# Altium PCB ACFB_PCB.PcbDoc
Units mil, origin at the board's own origin, x right, y up, seen from the top; angles counter-clockwise.
Board outline 3681.1 x 2362.2 mil, 4 copper layers (Top Layer, Layer 2, Layer 3, Bottom Layer), stack 23.756 mil thick; 102 components, 44 nets, 278 pads, 289 vias.
Unrouted connection lines stored in the file: 1.
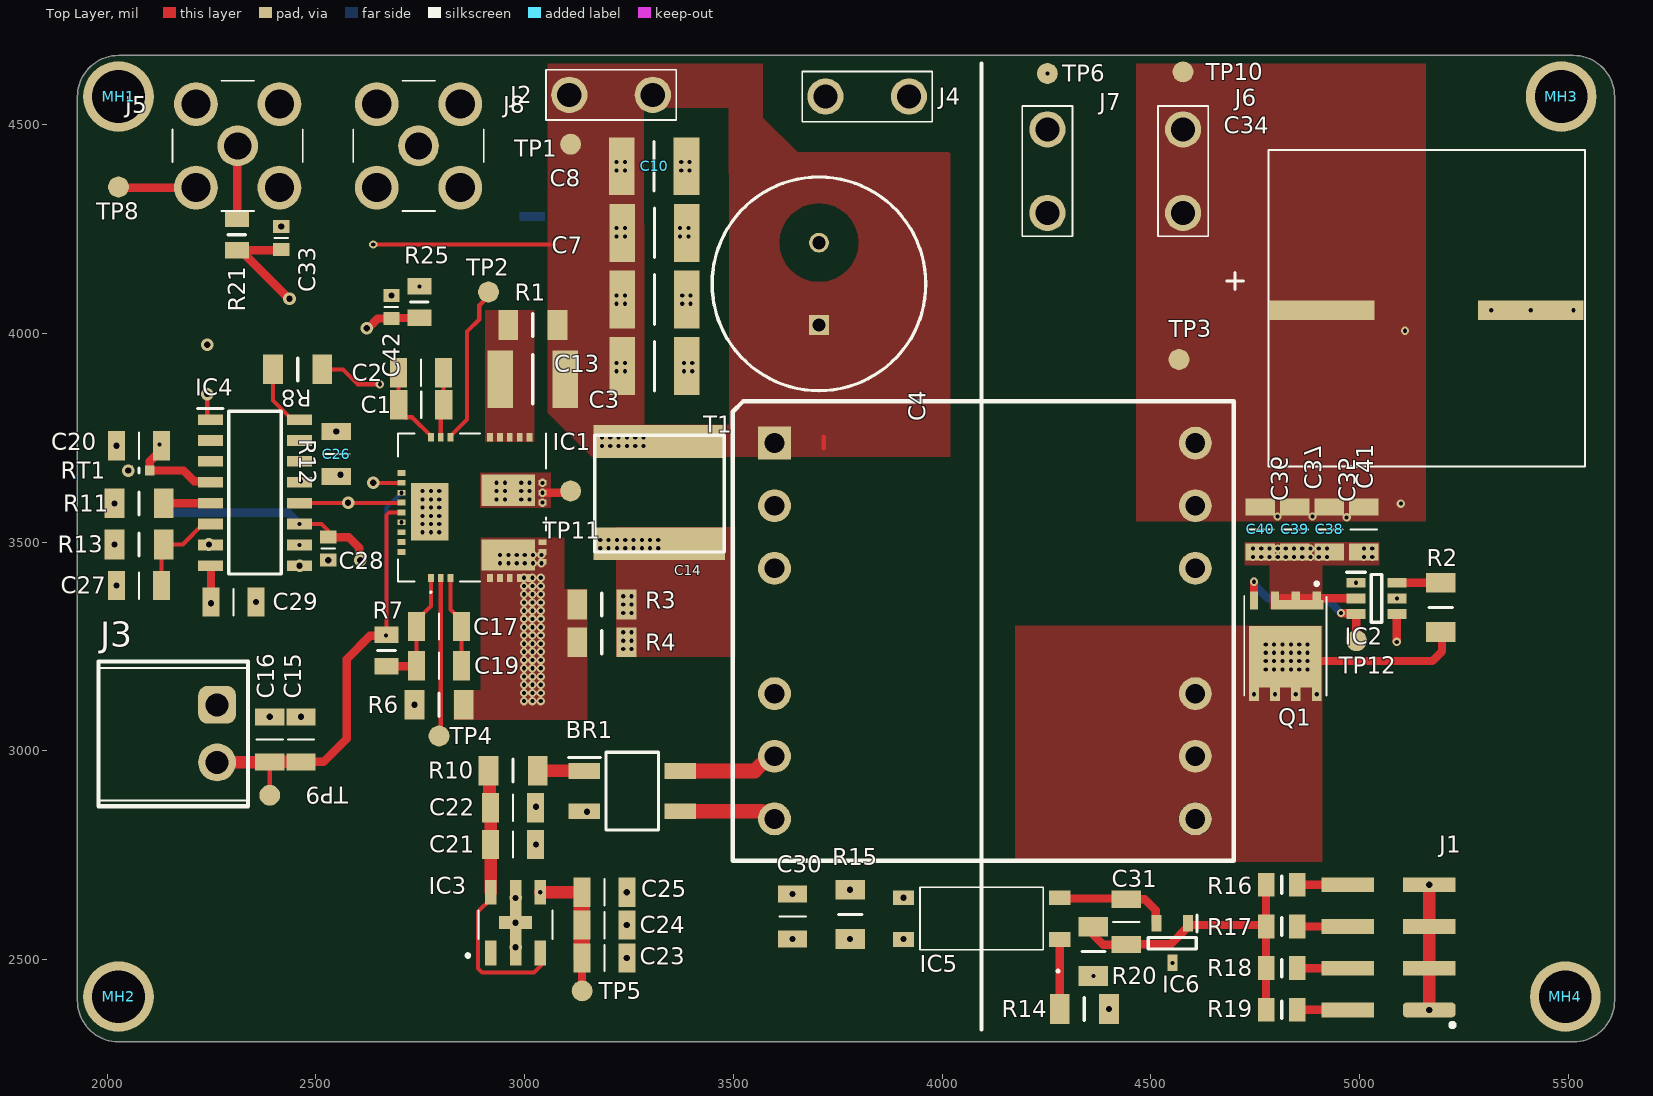
[diagram p0: Top Layer view]
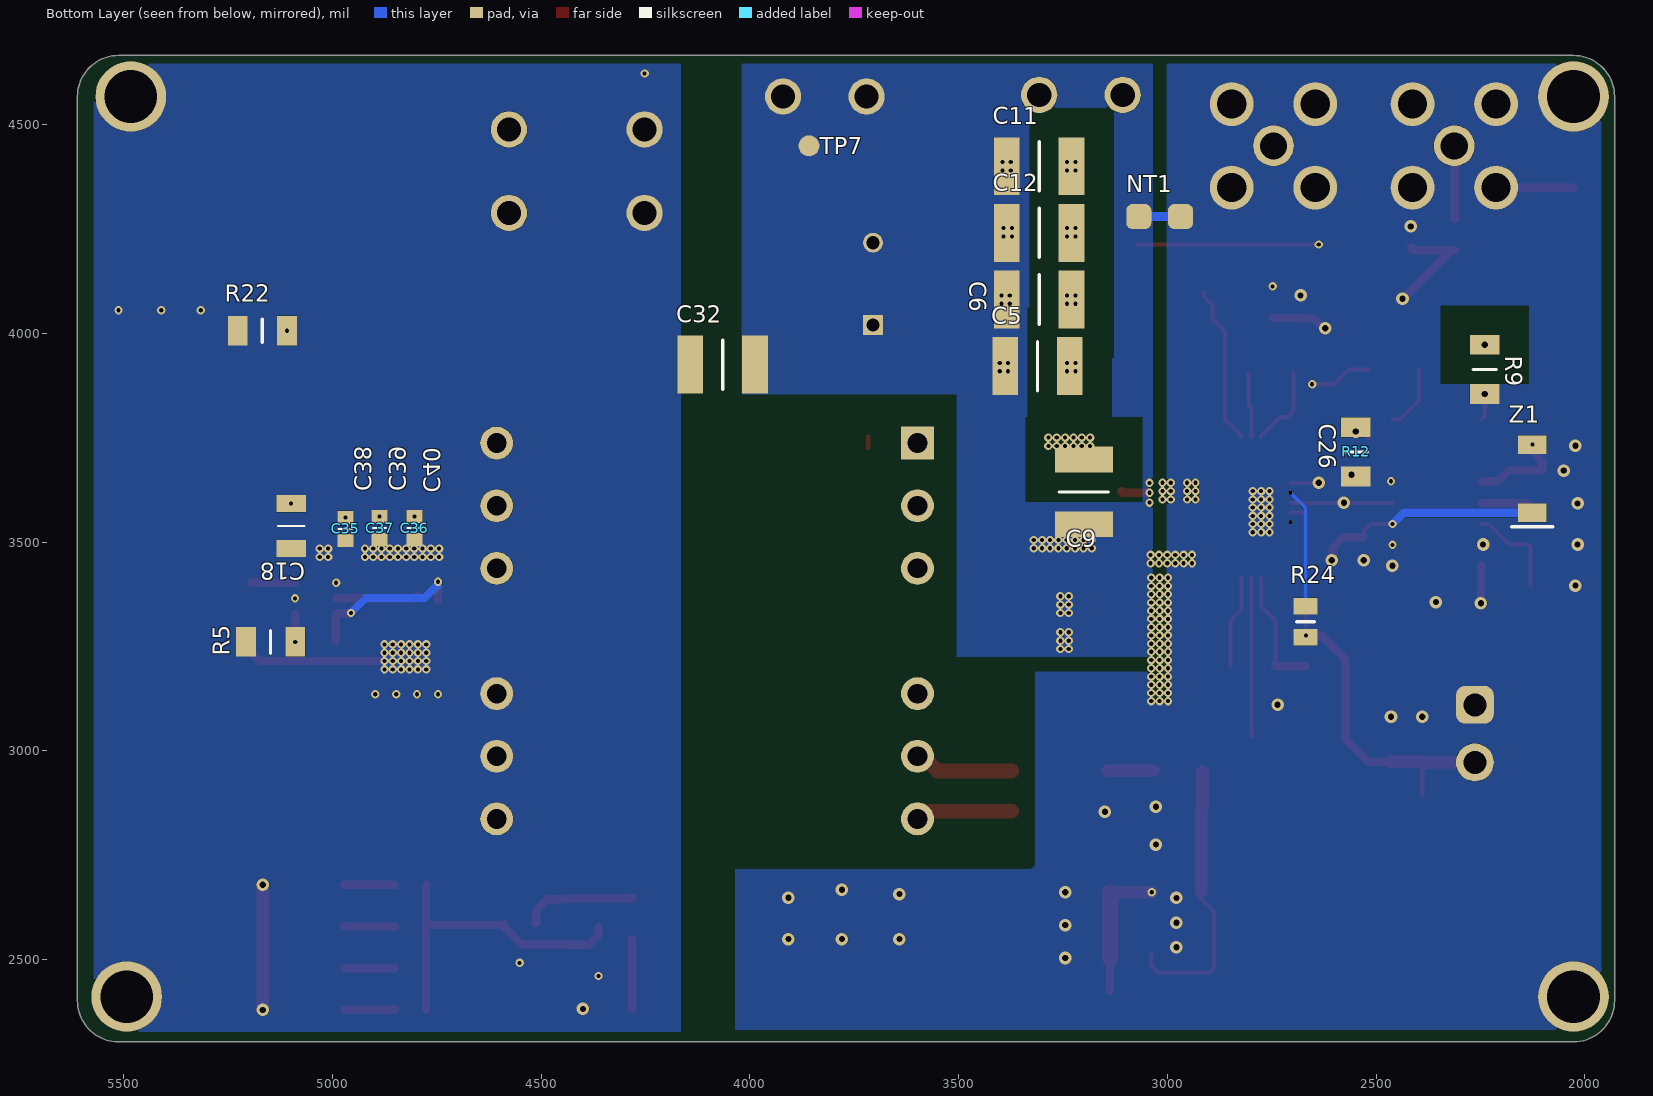
[diagram p1: Bottom Layer view, seen from below]
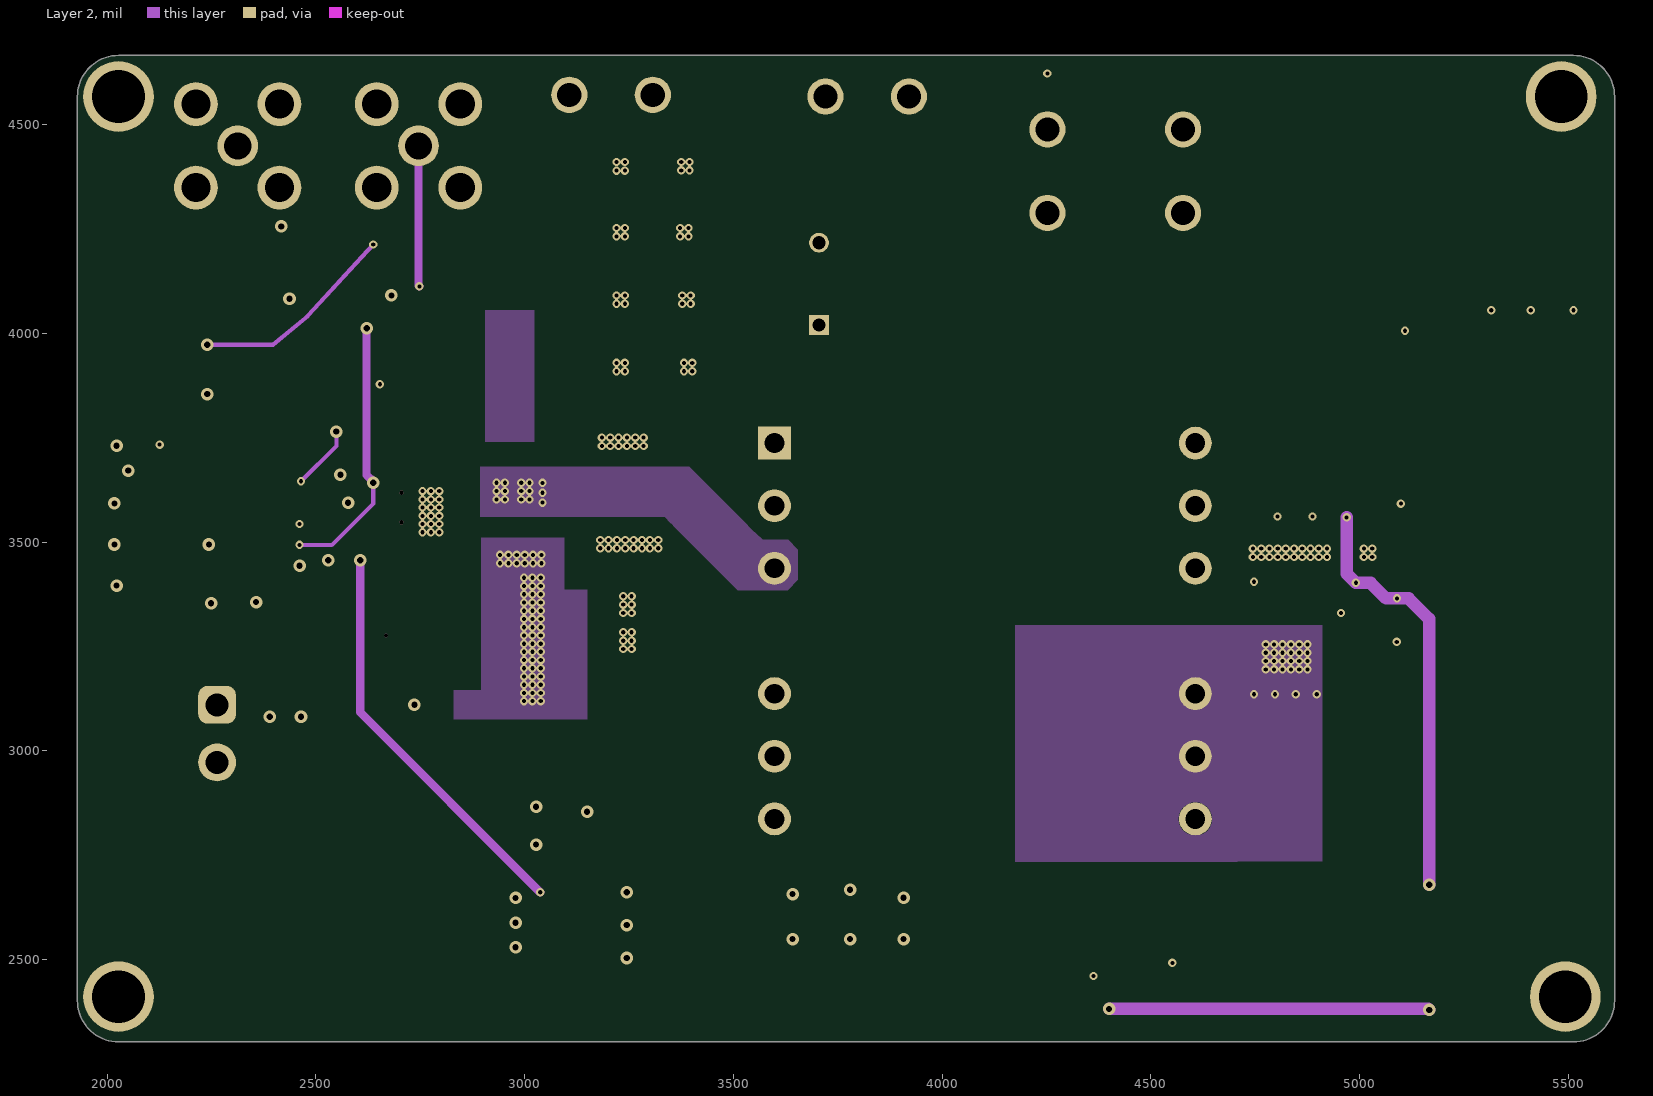
[diagram p2: Layer 2]
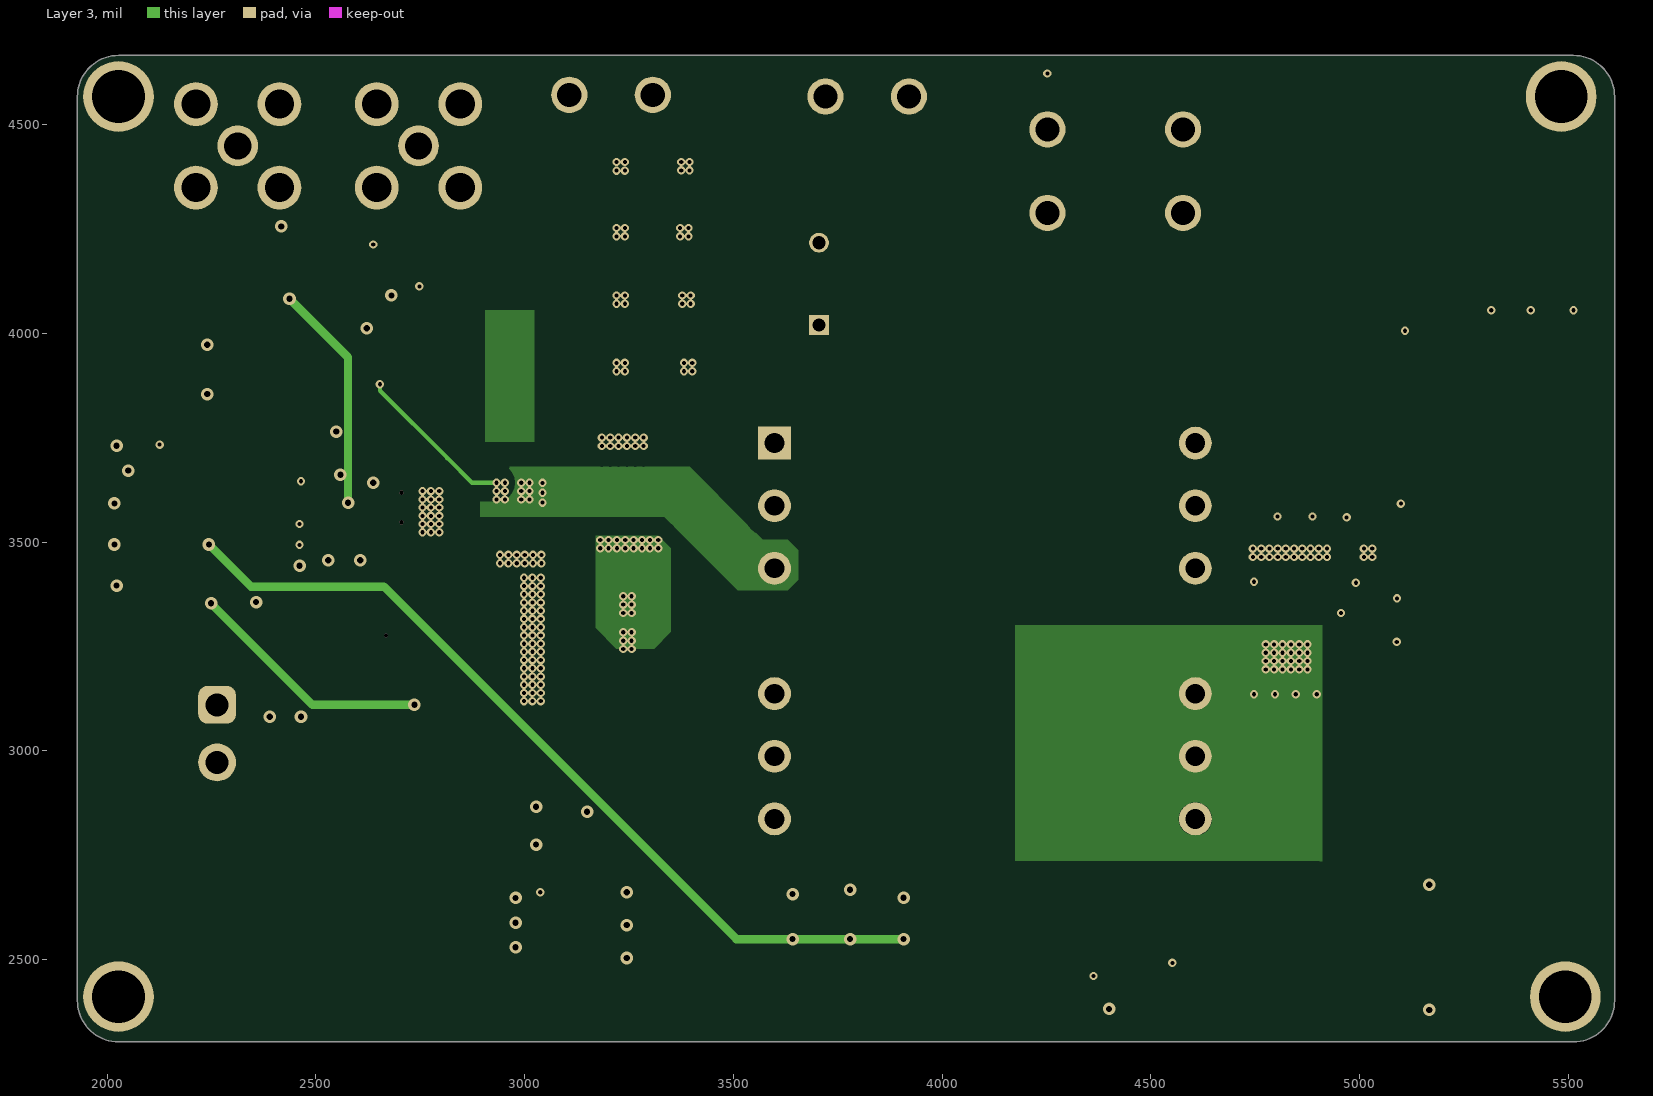
[diagram p3: Layer 3]

## Layer stack, top to bottom
Top Solder: solder mask 0.4, Solder Resist, Dk 3.5
Top Layer: signal copper 1.378
Dielectric 2: prepreg 2.8, PP-006, Dk 4.1
Layer 2: signal copper 1.4
Dielectric 1: dielectric 12.6, FR-4, Dk 4.8
Layer 3: signal copper 1.4
Dielectric 3: prepreg 2.8, PP-006, Dk 4.1
Bottom Layer: signal copper 1.378
Bottom Solder: solder mask 0.4, Solder Resist, Dk 3.5

## Board outline
1929.13,2401.97 1929.13,4566.54 cw(c2027.95,4566.54) 2027.95,4665.35 5511.42,4665.35 cw(c5511.42,4566.54) 5610.24,4566.54 5610.24,2401.97 cw(c5511.42,2401.97) 5511.42,2303.15 2027.95,2303.15 cw(c2027.95,2401.97)

## Design rules (kind name [scope] priority, off if disabled: settings)
Clearance Clearance_1 [All] p1 off: gap=12 ignorepadtopadclearanceinfootprint=TRUE
Clearance 192122 [InNet('NetC1_1') OR InNet('NetC1_2') OR InNet('NetC3_1')] p2: gap=1 ignorepadtopadclearanceinfootprint=TRUE
Clearance HighVoltageTopBottom [(InNetClass('HighVoltage') AND OnLayer('Bottom Layer'))  Or (InNetClass('HighVoltage') AND OnLayer('Top Layer'))] p3: gap=70 ignorepadtopadclearanceinfootprint=TRUE
Clearance HighVoltageMiddle [(InNetClass('HighVoltage') AND OnLayer('Layer 2'))  Or (InNetClass('HighVoltage') AND OnLayer('Layer 3'))] p4: gap=40 ignorepadtopadclearanceinfootprint=TRUE
Clearance HINLIN5 [InComponent('ic1')] p5: gap=1 ignorepadtopadclearanceinfootprint=TRUE
Height [All] p1: minheight=0 maxheight=1500 prefheight=500
PlaneConnect [All] p1: planeconnectstyle=Direct reliefexpansion=20 reliefentries=4 reliefconductorwidth=10 reliefairgap=10
PolygonConnect [All] p1: connectstyle=Direct reliefconductorwidth=10 reliefentries=4 polygonreliefangle="90 Angle" airgapwidth=10
RoutingVias [All] p1: holewidth=15 width=30 viastyle="Through Hole" minholewidth=10 minwidth=20 maxholewidth=30 maxwidth=60
SolderMaskExpansion [All] p1: expansion=4 istentingtop=FALSE
UnRoutedNet [All] p1: checkbadconnections=TRUE
Width [All] p1: maxlimit=200 minlimit=10 preferedwidth=20
27 further rules are at their usual default settings.

## Classes and differential pairs
net class HighVoltage: NetC1_2 NetIC1_12 NetIC1_20 VIN
component class main: BR1 C1 C2 C3 C4 C5 C6 C7 C8 C9 C10 C11 C12 C13 C14 C15 C16 C17 C18 C19 C20 C21 C22 C23 C24 C25 C26 C27 C28 C29 C30 C31 C37 IC1 IC2 IC3 IC4 IC5 IC6 J1 Q1 R1 R2 R3 R4 R5 R6 R7 R8 R9 R10 R11 R12 R13 R14 R15 R16 R17 R18 R19 R20 R24 RT1 T1 TP1 TP2 TP3 TP4 TP5 TP11 TP12 Z1
component class in_out: C11 C12 C13 C29 C30 C31 C32 C33 C34 C35 C36 C37 C38 C39 C40 C41 C42 J2 J3 J4 J5 J6 J7 J8 MH1 MH2 MH3 MH4 NT1 R1 R21 R22 R25 TP6 TP7 TP8 TP9 TP10

## Components (designator, comment, footprint, x,y, rotation, side; value= is the part's Value field where it differs from the comment)
BR1 "MB4S" SOP245P670X290-4N 3257.87,2903.54 r0 top
C1 "0.1uF" Capcitor_1206 2752.54,3828.74 r0 top
C2 "0.1uF" Capcitor_1206 2751.97,3905.51 r0 top
C3 "470nF" Capacitor_1812 3019.68,3889.76 r0 top
C4 "22uF" CAPPRD500W60D1300H2700 3705,4020 r90 top
C5 "220nF" Capacitor_1812 3311.02,3921.26 r180 bottom
C6 "220nF" Capacitor_1812 3307.09,4080.84 r0 bottom
C7 "220nF" Capacitor_1812 3311.02,4080.84 r180 top
C8 "220nF" Capacitor_1812 3311.02,4240.42 r0 top
C9 "220nF" Capacitor_1812 3200,3620 r90 bottom
C10 "220nF" Capacitor_1812 3310,4400 r0 top
C11 "220nF" Capacitor_1812 3307.09,4400 r0 bottom
C12 "220nF" Capacitor_1812 3307.09,4240.42 r180 bottom
C13 "220nF" Capacitor_1812 3311.02,3921.26 r0 top
C14 "1u" TDKB58031 3167.83,3756.06 r270 top
C15 "10uF" Capcitor_1206 2464.57,3027.56 r270 top
C16 "0.1uF" Capcitor_1206 2389.76,3027.56 r90 top
C17 "0.1uF" Capcitor_1206 2795.28,3297.64 r0 top
C18 "1uF" Capcitor_1206 5098.42,3538.19 r90 bottom
C19 "10uF" Capcitor_1206 2795.28,3203.74 r0 top
C20 "100nF" Capcitor_1206 2076.77,3730.32 r0 top
C21 "2.2uF" Capcitor_1206 2972.44,2775.59 r180 top
C22 "2.2uF" Capcitor_1206 2972.44,2863.97 r180 top
C23 "2.2uF" Capcitor_1206 3190.94,2503.94 r180 top
C24 "2.2uF" Capcitor_1206 3190.94,2582.68 r180 top
C25 "2.2uF" Capcitor_1206 3190.94,2661.42 r180 top
C26 "100nF" Capcitor_1206 2549.21,3710.63 r90 top
C27 "100nF" Capcitor_1206 2076.77,3395.67 r180 top
C28 "1uF" Capacitor_0805 2529.53,3484.25 r90 top
C29 "10nF" Capcitor_1206 2303.15,3356.3 r0 top
C30 "100nF" Capcitor_1206 3641.73,2603.15 r270 top
C31 "100nF" Capcitor_1206 4440.94,2590.55 r270 top
C32 "390pF" Capacitor_1812 4065,3925 r180 bottom
C33 "100pF" Capacitor_0805 2417.32,4228.35 r270 top
C34 "2700uF" Capacitor_Electrolytic_Vib_Res 5161.42,4055.12 r0 top
C35 "100nF" Capacitor_0805 4968.5,3531.5 r90 bottom
C36 "100nF" Capacitor_0805 4803.15,3533.46 r90 bottom
C37 "100nF" Capacitor_0805 4886.81,3533.46 r90 bottom
C38 "2.2uF" Capcitor_1206 4927.22,3530.12 r90 top
C39 "2.2uF" Capcitor_1206 4844.6,3530.12 r90 top
C40 "2.2uF" Capcitor_1206 4761.98,3530.12 r90 top
C41 "2.2uF" Capcitor_1206 5009.84,3530.12 r90 top
C42 "100pF" Capacitor_0805 2681.1,4062.99 r270 top
IC1 "MASTERGAN1" MASTERGAN1 2874.02,3582.68 r90 top
IC2 "SRK1000" SOT95P280X145-6N 5040,3365 r0 top
IC3 "S-1212BG0-U5T1U" S1212BG0U5T1U 2978.35,2588.58 r0 top
IC4 "NCP1568S02DBR2G" SOIC127P600X175-16N 2354.33,3618.11 r0 top
IC5 "FODM1009R2V" FODM1009R2V 4094.49,2598.43 r90 top
IC6 "NCP431AVSNT1G" SOT96P237X111-3N 4551.18,2539.37 r270 top
J1 "Header_2x4" Header_2x4 5068.9,2529.53 r90 top
J2 "1289-STR" 1289STR 3107.09,4570.87 r0 top
J3 "Connector_3.5mm" Connector_3.5 2263.78,3041.34 r270 top
J4 "1289-STR" 1289STR 3720.47,4566.93 r0 top
J5 "142-0701-301" 1420701301 2312.99,4448.82 r90 top
J6 "1289-STR" 1289STR 4576.77,4488.19 r270 top
J7 "1289-STR" 1289STR 4251.97,4488.19 r270 top
J8 "142-0701-301" 1420701301 2746.06,4448.82 r90 top
MH1 "Mounting_Hole_M3" Mounting_Hole_M3#1 1948.82,4586.61 r0 top
MH2 "Mounting_Hole_M3" Mounting_Hole_M3#2 1958.66,2411.42 r0 top
MH3 "Mounting_Hole_M3" Mounting_Hole_M3#3 5521.65,4576.77 r0 top
MH4 "Mounting_Hole_M3" Mounting_Hole_M3#4 5531.5,2411.42 r0 top
NT1 "Net tie" "Net tie" 3068.5,4279.53 r180 bottom net-tie
Q1 "BSC014N06NSATMA1" BSC010N04LS6ATMA1 4821.85,3250.59 r180 top
R1 "300k" Resistor_1206 3019.68,4019.68 r0 top
R2 "330" Resistor_1206 5193.9,3343.5 r270 top
R3 "R680" Resistor_1206 3185.04,3350.39 r0 top
R4 "R680" Resistor_1206 3185.04,3259.84 r0 top
R5 "82k" Resistor_1206 5147.64,3260.83 r180 bottom
R6 "510" Resistor_1206 2795.28,3110.24 r0 top
R7 "0" Resistor_0805 2669.29,3240.16 r270 top
R8 "1k" Resistor_1206 2456.69,3913.39 r0 top
R9 "1k" Resistor_1206 2240.16,3913.39 r90 bottom
R10 "1" Resistor_1206 2972.44,2952.76 r180 top
R11 "82k" Resistor_1206 2076.77,3592.52 r180 top
R12 "8k" Resistor_1206 2549.21,3715.75 r90 bottom
R13 "82k" Resistor_1206 2076.77,3494.09 r180 top
R14 "1k" Resistor_1206 4340.55,2381.89 r0 top
R15 "47k" Resistor_1206 3779.53,2608.27 r270 top
R16 "154k" Resistor_0805 4812.99,2679.13 r0 top
R17 "91k" Resistor_0805 4812.99,2579.4 r0 top
R18 "62k" Resistor_0805 4812.99,2479.66 r0 top
R19 "24k" Resistor_0805 4812.99,2379.92 r0 top
R20 "24k" Resistor_1206 4362.2,2519.68 r90 top
R21 "51" Resistor_0805 2311.02,4236.22 r90 top
R22 "10k" Resistor_1206 5167.32,4005.91 r180 bottom
R24 "4.7k" Resistor_0805 2669.29,3309.06 r90 bottom
R25 "51" Resistor_0805 2748.03,4074.8 r90 top
RT1 "NTCG104EF104FT1SX" THRMC1005X55N 2076.77,3671.26 r0 top
T1 "TI-PQ26" PQ26-20-K 3598.42,3737.01 r0 top
TP1 "Test point" "Test point" 3110.24,4452.76 r0 top
TP2 "Test point" "Test point" 2913.39,4098.82 r90 top
TP3 "Test point" "Test point" 4566.93,3937.01 r90 top
TP4 "Test point" "Test point" 2795.28,3035.43 r90 top
TP5 "Test point" "Test point" 3137.79,2425.2 r0 top
TP6 "Test point" "Test point" 4251.97,4622.05 r180 top
TP7 "Test point" "Test point" 3858.27,4448.82 r180 bottom
TP8 "Test point" "Test point" 2027.56,4350.39 r90 top
TP9 "Test point" "Test point" 2389.76,2893.7 r180 top
TP10 "Test point" "Test point" 4576.77,4625.98 r180 top
TP11 "Test point" "Test point" 3110.24,3622.05 r90 top
TP12 "Test point" "Test point" 4992.13,3263.78 r90 top
Z1 "TDZ15J" SODFL4725X105N 2125.98,3651.57 r90 bottom

## Footprints (in the part's own frame and the unit in brackets; to place one, negate y for a bottom-side part, rotate by r counter-clockwise, add the part's x,y. Pads: shape width x height; smd on the part's side, far side on the other; paste and mask are expansions set on the pad)
1289STR [mm]
  round 2.205 hole 1.47: 1(0,0) 2(5.08,0)
  silkscreen extent -1.42,-1.53 6.5,1.53, body extent -1.42,-1.53 6.5,1.53, height 14.47
1420701301 [mil]
  round 97.52 hole 65: 1(0,0)
  round 105 hole 70: 2(-100,100) 3(-100,-100) 4(100,-100) 5(100,100)
  silkscreen extent -156,-156 156,156, body extent -150,-156 466,156, height 378
BSC010N04LS6ATMA1 [mm]
  rect 0.5x0.5 smd: 1(-1.905,-3.075) 2(-0.635,-3.075) 3(0.635,-3.075)
  rect 0.5x1.1 smd: 4(1.905,-2.775)
  rect 0.6x0.8 smd: 5(1.905,2.925) 6(0.635,2.925) 7(-0.635,2.925) 8(-1.905,2.925)
  rect 4.41x3.75 smd: 9(0,0.65)
  rect 3.2x0.6 smd: 10(-0.715,-2.525)
  silkscreen extent -2.5,-3.9 2.5,3, body extent -2.5,-3.27 2.5,3.26, height 1.2
Capacitor_0805 [mm] "Capacitor - standard SMD"
  rect 0.78x0.99 smd: 1(-0.7,0) 2(0.7,0)
  silkscreen extent 0,-0.4 0,0.41, body extent -0.8,-0.41 0.8,0.41, height 0.9
Capacitor_1812 [mm] "Capacitor - Stnadard SMD"
  rect 1.56x3.52 smd: 1(-1.97,0) 2(1.97,0)
  silkscreen extent 0,-1.5 0,1.5, body extent -2.3,-1.6 2.3,1.6, height 2.8
Capacitor_Electrolytic_Vib_Res [mm] "Capacitor _ Electrolytic SMD"
  rect 6.4x1.2 smd: 1(-6.4,0) 2(6.3,0)
  silkscreen extent -12.19,-9.5 9.6,9.75, body extent -9,-8.75 9,9.25, height 21
Capcitor_1206 [mm] "Capacitor - Stnadard SMD"
  rect 1.04x1.78 smd: 1(-1.37,0) 2(1.37,0)
  silkscreen extent 0,-0.8 0,0.8, body extent -1.6,-0.8 1.6,0.8, height 0.95
CAPPRD500W60D1300H2700 [mm]
  rect 1.2x1.2 hole 0.8: 1(0,0)
  round 1.2 hole 0.8: 2(5,0)
  silkscreen extent -4,-6.5 9,6.5, body extent -4.23,-6.75 9.23,6.75, height 27
Connector_3.5 [mm] "Connector"
  rrect50% 2.3x2.3 hole 1.4: 1(-1.75,0)
  round 2.3 hole 1.4: 2(1.75,0)
  silkscreen extent -4.37,-7.22 4.43,1.9, body extent -4,-7.22 4.08,1.88, height 20
FODM1009R2V [mm]
  rect 0.9x1.3 smd: 1(-1.27,-4.75) 2(1.27,-4.75) 3(1.27,4.75) 4(-1.27,4.75)
  silkscreen extent -3.25,-4.7 1.9,3.75, body extent -1.91,-4.44 1.91,4.44, height 2.2
Header_2x4 [mm] "Goldpins Male"
  rrect50% 0.9x3.2 smd: 1(-3.81,-2.475)
  rect 0.9x3.2 smd: 2(-3.81,2.475) 3(-1.27,-2.475) 4(-1.27,2.475) 5(1.27,-2.475) 6(1.27,2.475) 7(3.81,-2.475) 8(3.81,2.475)
  silkscreen extent -4.85,-4.01 -4.6,-3.76, body extent -5.16,-3.75 5.16,3.75, height 10.05
MASTERGAN1 [mm]
  rect 0.5x0.35 smd: 1(-4.28,2.5) 2(-4.28,1.9) 3(-4.28,1.3) 4(-4.28,-1.1) 5(-4.28,-1.7) 6(-4.28,-2.3) 7(-4.28,-2.9) 8(-4.28,-3.5) 15(4.28,-3.5) 16(4.28,-2.9) 17(4.28,-2.3) 18(4.28,-1.7) 19(4.28,-1.1) 20(4.28,1.3) 21(4.28,1.9) 22(4.28,2.5)
  rect 0.35x0.5 smd: 9(-3.305,-4.29) 10(-2.705,-4.29) 11(-2.105,-4.29) 12(0.3,-4.29) 13(0.9,-4.29) 14(1.5,-4.29) 23(2.1,4.29) 24(1.5,4.29) 25(0.9,4.29) 26(0.3,4.29) 27(-0.3,4.29) 28(-0.9,4.29) 29(-1.5,4.29) 30(-2.1,4.29) 31(-2.7,4.29)
  rect 3.5x2.26 smd: MP1(-0.25,2.57)
  rect 1.9x3.25 smd: MP2(-2.88,-2.215) MP3(1.05,-2.215)
  silkscreen extent -5.2,-4.5 4.5,4.5, body extent -4.5,-4.5 4.5,4.5, height 1.1
Mounting_Hole_M3#1 [mil]
  round 169 hole 126: 1(78.74,-19.68)
Mounting_Hole_M3#2 [mil]
  round 169 hole 126: 1(68.9,0)
Mounting_Hole_M3#3 [mil]
  round 169 hole 126: 1(-39.37,-9.84)
Mounting_Hole_M3#4 [mil]
  round 169 hole 126: 1(-39.37,0)
"Net tie" [mil] "Net tie - SMD short"
  rrect50% 60x60 smd: 1(0,0) 2(100,0)
  Top Layer region: 20,10 80,10 80,-10 20,-10
PQ26-20-K [mm] "Transformer"
  rect 2x2 hole 1.2: 1(0,0)
  round 2 hole 1.2: 2(0,-3.81) 3(0,-7.62) 4(0,-15.24) 5(0,-19.05) 6(0,-22.86) 7(25.6,-22.86) 8(25.6,-19.05) 9(25.6,-15.24) 10(25.6,-7.62) 11(25.6,-3.81) 12(25.6,0)
  silkscreen extent -2.54,-25.4 27.94,2.54, body extent -1.95,-25.08 27.35,2.22, height 25.1
Resistor_0805 [mm] "Resistor - Standard SMD"
  rect 1x1.45 smd: 1(-0.95,0) 2(0.95,0)
  silkscreen extent 0,-0.52 0,0.52, body extent -1,-0.63 1,0.63, height 0.65
Resistor_1206 [mm] "Resistor - Stnadard SMD"
  rect 1.2x1.8 smd: 1(-1.5,0) 2(1.5,0)
  silkscreen extent 0,-0.7 0,0.7, body extent -1.6,-0.8 1.6,0.8, height 0.75
S1212BG0U5T1U [mm]
  rect 0.7x1.5 smd: 1(-1.5,-1.85) 3(1.5,-1.85) 4(1.5,1.85) 5(-1.5,1.85)
  rect 0.7x2.2 smd: 2(0,-1.5) A2(0,1.5)
  rect 2x0.8 smd: B2(0,0)
  silkscreen extent -3,-2.1 2.25,0.75, body extent -2.25,-1.25 2.25,1.25, height 1.7
SODFL4725X105N [mm]
  rect 1.12x1.72 smd: 1(-2.075,0) 2(2.075,0)
  silkscreen extent -2.92,-1.25 -2.92,1.25, body extent -2.35,-1.25 2.35,1.25, height 1.05
SOIC127P600X175-16N [mm]
  rect 1.525x0.65 smd: 1(-2.712,4.445) 2(-2.712,3.175) 3(-2.712,1.905) 4(-2.712,0.635) 5(-2.712,-0.635) 6(-2.712,-1.905) 7(-2.712,-3.175) 8(-2.712,-4.445) 9(2.712,-4.445) 10(2.712,-3.175) 11(2.712,-1.905) 12(2.712,-0.635) 13(2.712,0.635) 14(2.712,1.905) 15(2.712,3.175) 16(2.712,4.445)
  silkscreen extent -3.47,-4.95 1.6,5.12, body extent -3,-4.95 3,4.95, height 1.75
SOP245P670X290-4N [mm]
  rect 1.925x0.95 smd: 1(-2.912,1.225) 2(-2.912,-1.225) 3(2.912,-1.225) 4(2.912,1.225)
  silkscreen extent -3.88,-2.36 1.6,2.36, body extent -3.35,-2.36 3.35,2.36, height 2.9
SOT95P280X145-6N [mm]
  rect 1.15x0.6 smd: 1(-1.25,0.95) 2(-1.25,0) 3(-1.25,-0.95) 4(1.25,-0.95) 5(1.25,0) 6(1.25,0.95)
  silkscreen extent -1.83,-1.45 0.33,1.6, body extent -1.4,-1.45 1.4,1.45, height 1.45
SOT96P237X111-3N [mm]
  rect 1x0.6 smd: 1(-1.2,0.955) 2(-1.2,-0.955) 3(1.2,0)
  silkscreen extent -1.7,-1.46 0.35,1.5, body extent -1.18,-1.46 1.18,1.46, height 1.11
TDKB58031 [mil] "1uF 500volt Ceralink (LP) J-Style, Mouser: B58031U5105M062"
  rect 78.74x314.96 smd: 1(15,155) 2(260,155)
  silkscreen extent 0,0 280,310, body extent 5,0 280,310, height 197
"Test point" [mil] "Test point SMD, 50 mil"
  round 50 smd: 1(0,0)
THRMC1005X55N [mm]
  rect 0.55x0.6 smd: 1(-0.65,0) 2(0.65,0)
  silkscreen extent 0,-0.15 0,0.15, body extent -0.5,-0.25 0.5,0.25, height 0.55

## Part data
BR1: "Bridge Rectifier", Manufacturer_Name=onsemi, Mouser Part Number=512-MB4S, Arrow Part Number=MB4S, Arrow Price/Stock=https://www.arrow.com/en/products/mb4s/on-semiconductor?region=europe, Datasheet Link=http://www.onsemi.com/pub/Collateral/MB8S-D.PDF, Height=2.9mm, Manufacturer_Part_Number=MB4S, Mouser Price/Stock=https://www.mouser.co.uk/ProductDetail/onsemi-Fairchild/MB4S?qs=DPwKKv7J1fyzyqMN%2FwPoFQ%3D%3D
C1 C2: library part Capacitor_1206, "Capacitor - Standard SMD", Voltage=25V, Capacitance=0.1uF
C3: library part Capacitor_1812, "Capacitor - Standard SMD", MPN=CGA8N4X7T2W474K230KA, Voltage=450V, Capacitance=470nF
C4: library part Capacitor_Electrolytic_THT, "Capacitor - Electrolytic  THT", MPN=ESH226M500AL4AA, Voltage=500V, Capacitance=22uF
C5 C6 C7 C8 C9 C10 C11 C12 C13: library part Capacitor_1812, "Capacitor - Standard SMD", MPN=C1812C224MCRACTU, Voltage=500, Capacitance=220nF
C14: library part Capacitor_1206, "Capacitor - Standard SMD", Capacitance=100nF, MPN=1206B104K451CT, Voltage=450V
C15 C16 C17 C19: library part Capacitor_1206, "Capacitor - Standard SMD", Voltage=16V
  C15 C19: Capacitance=10uF
  C16 C17: Capacitance=0.1uF
C18: library part Capacitor_1206, "Capacitor - Standard SMD", MPN=CL31B105KBHNFNE, Voltage=50, Capacitance=1uF
C20 C26 C27 C29 C30 C31: library part Capacitor_1206, "Capacitor - Standard SMD", Voltage=50V
  C20 C26 C27 C30 C31: Capacitance=100nF
  C29: Capacitance=10nF
C21 C22 C23 C24 C25 C38 C39 C40 C41: library part Capacitor_1206, "Capacitor - Standard SMD", MPN=CL31B225KBHNFNE, Voltage=50V, Capacitance=2.2uF
C28: library part Capacitor_0805, "Capacitor - Standard SMD", Voltage=25V, Capacitance=1uF
C32: library part Capacitor_1812, "Capacitor - Standard SMD", MPN=1812B391K202CT, Voltage=2kV, Capacitance=390pF
C33 C42: library part Capacitor_0805, "Capacitor - Standard SMD", Voltage=12V, Capacitance=100pF
C34: library part Capacitor_Electrolytic_Vib_Res, "Capacitor - Electrolytic  SMD", Voltage=35V, Capacitance=2700uF
C35 C36 C37: library part Capacitor_0805, "Capacitor - Standard SMD", MPN=CL21B104KBCNNND, Voltage=50V, Capacitance=100nF
IC1: "Integrated Circuit", Manufacturer_Name=STMicroelectronics, Mouser Part Number=511-MASTERGAN1, Arrow Part Number=MASTERGAN1, Arrow Price/Stock=https://www.arrow.com/en/products/mastergan1/stmicroelectronics?region=nac, Datasheet Link=https://www.mouser.com/datasheet/2/389/mastergan1-1893186.pdf, Height=1mm, Manufacturer_Part_Number=MASTERGAN1, Mouser Price/Stock=https://www.mouser.co.uk/ProductDetail/STMicroelectronics/MASTERGAN1?qs=hWgE7mdIu5TUQlvSzk235A%3D%3D
IC2: "Integrated Circuit", Manufacturer_Name=STMicroelectronics, Mouser Part Number=511-SRK1000, Arrow Part Number=SRK1000, Arrow Price/Stock=https://www.arrow.com/en/products/srk1000/stmicroelectronics, Datasheet Link=https://www.st.com/resource/en/datasheet/srk1000.pdf, Height=1.45mm, Manufacturer_Part_Number=SRK1000, Mouser Price/Stock=https://www.mouser.co.uk/ProductDetail/STMicroelectronics/SRK1000?qs=byeeYqUIh0P1pUk%2FLXsjaA%3D%3D
IC3: "Integrated Circuit", Manufacturer_Name="ABLIC Inc.", Mouser Part Number=628-S-1212BG0-U5T1U, Datasheet Link=https://www.mouser.com/datasheet/2/360/S1212B_D_E-1480071.pdf, Height=1.6mm, Manufacturer_Part_Number=S-1212BG0-U5T1U, Mouser Price/Stock=https://www.mouser.co.uk/ProductDetail/ABLIC/S-1212BG0-U5T1U?qs=PqoDHHvF648vInS7ukjfAw%3D%3D
IC4: "Integrated Circuit", Manufacturer_Name=onsemi, Mouser Part Number=863-NCP1568S02DBR2G, Arrow Part Number=NCP1568S02DBR2G, Arrow Price/Stock=https://www.arrow.com/en/products/ncp1568s02dbr2g/on-semiconductor?region=nac, Datasheet Link=https://datasheet.datasheetarchive.com/originals/distributors/Datasheets_SAMA/e6c73cfd9b14743cc4dd16ca5df3e455.pdf, Height=1.35mm, Manufacturer_Part_Number=NCP1568S02DBR2G, Mouser Price/Stock=https://www.mouser.co.uk/ProductDetail/onsemi/NCP1568S02DBR2G?qs=BJlw7L4Cy7%252Bni9d8vX6s0A%3D%3D
IC5: "Integrated Circuit", Manufacturer_Name=onsemi, Mouser Part Number=863-FODM1009R2V, Arrow Part Number=FODM1009R2V, Arrow Price/Stock=https://www.arrow.com/en/products/fodm1009r2v/on-semiconductor?region=nac, Datasheet Link=https://componentsearchengine.com/Datasheets/1/FODM1009R2V.pdf, Height=2.4mm, Manufacturer_Part_Number=FODM1009R2V, Mouser Price/Stock=https://www.mouser.co.uk/ProductDetail/onsemi/FODM1009R2V?qs=d0WKAl%252BL4Kbb4VetG0t5Tw%3D%3D
IC6: "Programmable Precision / Reference", Manufacturer_Name=onsemi, Mouser Part Number=863-NCP431AVSNT1G, Arrow Part Number=NCP431AVSNT1G, Arrow Price/Stock=https://www.arrow.com/en/products/ncp431avsnt1g/on-semiconductor, Datasheet Link=http://www.onsemi.com/pub/Collateral/NCP431-D.PDF, Height=1.11mm, Manufacturer_Part_Number=NCP431AVSNT1G, Mouser Price/Stock=https://www.mouser.com/Search/Refine.aspx?Keyword=863-NCP431AVSNT1G
J2 J4 J6 J7: "Connector", Manufacturer_Name="Keystone Electronics", Mouser Part Number=534-1289-STR, Datasheet Link=https://www.mouser.com/datasheet/2/215/Keystone_Electronics_12182018_1289-ST-1510776.pdf, Height=14.37mm, Manufacturer_Part_Number=1289-STR, Mouser Price/Stock=https://www.mouser.co.uk/ProductDetail/Keystone-Electronics/1289-STR?qs=0lSvoLzn4L%252BMUIbPVNHg8g%3D%3D
J5 J8: "Connector", Manufacturer_Name="Cinch Connectivity Solutions", Mouser Part Number=530-142-0701-301, Arrow Part Number=142-0701-301, Arrow Price/Stock=https://www.arrow.com/en/products/142-0701-301/cinch-connectivity-solutions?region=nac, Datasheet Link=https://datasheet.datasheetarchive.com/originals/distributors/Datasheets_SAMA/2ec9b041f970d014d2778887508fd87c.pdf, Design Item ID=142-0701-301, Height=9.779mm, Manufacturer_Part_Number=142-0701-301, Mouser Price/Stock=https://www.mouser.co.uk/ProductDetail/Johnson-Cinch-Connectivity-Solutions/142-0701-301?qs=VqHsQWpF6un5h9kBF%252BTxDw%3D%3D, Source=KN_ECART.SchLib
Q1: "MOSFET (N-Channel)", Manufacturer_Name=Infineon, Mouser Part Number=726-BSC014N06NSATMA1, Arrow Part Number=BSC014N06NSATMA1, Arrow Price/Stock=https://www.arrow.com/en/products/bsc014n06nsatma1/infineon-technologies-ag, Datasheet Link=http://www.farnell.com/datasheets/1849651.html, Height=1.1mm, Manufacturer_Part_Number=BSC014N06NSATMA1, Mouser Price/Stock=https://www.mouser.co.uk/ProductDetail/Infineon-Technologies/BSC014N06NSATMA1?qs=K00xGehIljshgUA78G26tg%3D%3D
R1 R2 R5 R6 R8 R9 R10 R11 R12 R13 R14 R15 R20 R22: library part Resistor_1206, "Resistor - Standard SMD"
  R1: Resistance=300k
  R2: Resistance=330
  R5 R11 R13: Resistance=82k
  R6: Resistance=510
  R8 R9 R14: Resistance=1k
  R10: Resistance=1
  R12: Resistance=8k
  R15: Resistance=47k
  R20: Resistance=24k
  R22: Resistance=10k
R3 R4: library part Resistor_1206, "Resistor - Standard SMD", MPN=PE1206FRF7W0R68L, Power rate="0.5 W", Resistance=R680
R7 R16 R17 R18 R19 R21 R24 R25: library part Resistor_0805, "Resistor - Standard SMD"
  R7: Resistance=0
  R16: Resistance=154k
  R17: Resistance=91k
  R18: Resistance=62k
  R19: Resistance=24k
  R21 R25: Resistance=51
  R24: Resistance=4.7k
RT1: "Thermistor", Manufacturer_Name=TDK, Mouser Part Number=810-NTC104EF104FT1SX, Arrow Part Number=NTCG104EF104FT1SX, Arrow Price/Stock=https://www.arrow.com/en/products/ntcg104ef104ft1sx/tdk, Datasheet Link=https://product.tdk.com/system/files/dam/doc/product/sensor/ntc/chip-ntc-thermistor/catalog/tpd_automotive_ntc-thermistor_ntcg_en.pdf, Height=0.55mm, Manufacturer_Part_Number=NTCG104EF104FT1SX, Mouser Price/Stock=https://www.mouser.co.uk/ProductDetail/TDK/NTCG104EF104FT1SX?qs=cNoPOocMWw25zdFQn%252B2tmg%3D%3D
T1: "Transformer", MPN=TI-PQ26/20-EPR11, HelpURL=https://dokumentacja.feryster.pl/rysuj.php?indeks=76996816298acf4170f50a7b81faccb4
Z1: "Zener Diode", Arrow Part Number=TDZ3V3J,115, Manufacturer_Name=Nexperia, Arrow Price/Stock=https://www.arrow.com/en/products/tdz3v3j115/nexperia, Datasheet Link=https://assets.nexperia.com/documents/data-sheet/TDZXJ_SER.pdf, Height=0.8mm, Manufacturer_Part_Number=TDZ15J, Mouser Price/Stock=https://www.mouser.co.uk/ProductDetail/Nexperia/TDZ3V3J115?qs=A1cBxND5mHI2cVlA%2FVFCtg%3D%3D

## Via types
v1: diameter 20, hole 10, Top Layer to Bottom Layer, 244 vias
v2: diameter 30, hole 15, Top Layer to Bottom Layer, 42 vias
v3: diameter 10, hole 10, Top Layer to Bottom Layer, 3 vias

## Nets (pads, with @x,y where several pads share a name; then routed paths per layer and width w, separated by ;. In a path a pad name is that pad's centre, name@x,y a point inside that pad or via, vN(x,y) a via of type N, cw(c..) or ccw(c..) an arc to the next point about the centre after c; other vN are vias at no path point)
+5: C15.2 C16.1 IC1.27 J3.2 R7.1 R24.1 TP9.1 | length 1069.8
  Top Layer w10: TP9.1 C16.1 ; R7.1 2669.29,3565.01 2675.15,3570.87 IC1.27
  Top Layer w20: C15.2 2518.5,2973.62 2574.21,3029.33 2574.21,3219.88 2629.92,3275.59 2667.32,3275.59 R7.1
  Top Layer w30: J3.2@2273.27,2981.93 J3.2 C16.1@2388.58,2972.44 ; C16.1@2384.29,2968.15 C16.1@2388.58,2972.44 ; C16.1@2389.76,2972.44 C16.1@2388.58,2972.44 ; C15.2 C16.1 C16.1@2388.58,2972.44
  other v3: 2668.31,3276.58
CSF: C29.1 IC4.8 R6.1 | length 678.3
  Top Layer w20: IC4.8 2249.21,3441.46 C29.1 v2(2249.21,3353.15)
  Layer 3 w20: v2(2249.21,3353.15) 2492.13,3110.24 v2(2736.22,3110.24)
Feedback: C30.2 IC4.7 IC5.4 R15.2 | length 2054.8
  Layer 3 w20: v2(2244.09,3494.09) 2344.89,3393.3 2662.96,3393.3 3507.05,2549.21 v2(3641.73,2549.21) v2(3779.53,2549.21) v2(3907.48,2549.21)
GND: C4.2 C5.1 C6.2 C7.1 C8.2 C9.1 C10.2 C11.2 C12.1 C13.2 C14.2 C32.2 J4.1 J4.2 NT1.1 R3.2 R4.2 TP7.1
  other v1: 3236.22,3243.78 3256.22,3243.78 3236.22,3263.78 3256.22,3263.78 3236.22,3283.78 3256.22,3283.78 3236.22,3330.08 3256.22,3330.08 3236.22,3350.08 3256.22,3350.08 3236.22,3370.08 3256.22,3370.08 3181.1,3485 3201.1,3485 3221.1,3485 3241.1,3485 3261.1,3485 3281.1,3485 3300,3485 3320,3485 3181.1,3505 3201.1,3505 3221.1,3505 3241.1,3505 3261.1,3505 3281.1,3505 3300,3505 3320,3505 3381.57,3909.13 3401.57,3909.13 3381.57,3929.13 3401.57,3929.13 3377.64,4070.55 3397.64,4070.55 3377.64,4090.55 3397.64,4090.55 3372.44,4231.97 3392.44,4231.97 3372.44,4251.97 3392.44,4251.97 3375,4390 3395,4390 3375,4410 3395,4410
GND_OUT: C18.1 C32.1 C34.2 C35.1 C36.1 C37.1 C38.1 C39.1 C40.1 C41.1 IC2.2 IC6.3 J7.1 J7.2 Q1.1 Q1.2 Q1.3 Q1.10 R5.1 R20.1 R22.1 TP6.1 | length 196.7
  Top Layer w20: Q1.3 4803.5,3365 IC2.2
  other v1: 4362.2,2460.63 4551.18,2492.13 4744.09,3464.25 4764.09,3464.25 4783.46,3464.25 4803.46,3464.25 4822.83,3464.25 4842.83,3464.25 4862.2,3464.25 4882.2,3464.25 4901.57,3464.25 4921.57,3464.25 5009.84,3464.25 5029.84,3464.25 4744.09,3484.25 4764.09,3484.25 4783.46,3484.25 4803.46,3484.25 4822.83,3484.25 4842.83,3484.25 4862.2,3484.25 4882.2,3484.25 4901.57,3484.25 4921.57,3484.25 5009.84,3484.25 5029.84,3484.25 5314.96,4055.12 5409.45,4055.12 5511.81,4055.12 4251.97,4622.05
HIN: C33.2 IC1.26 IC4.12 R21.1 | length 1063
  Top Layer w10: IC4.12 2461.57,3593.58 2576.74,3593.58 v2(2577.21,3594.05) ; v2@2579.72,3593.5 2704.13,3593.5 IC1.26
  Top Layer w20: R21.1 R21.1@2319.88,4198.82 ; C33.2@2417.32,4204.73 2413.19,4204.73 2407.28,4198.82 R21.1@2319.88,4198.82 ; v2(2437.01,4082.68) 2436.02,4082.68 R21.1@2319.88,4198.82
  Layer 3 w20: v2(2437.01,4082.68) 2577.21,3942.47 v2(2577.21,3594.05)
LDO_OUT: C23.2 C24.2 C25.2 C28.2 IC3.4 IC4.11 TP5.1 Z1.1 | length 1862.6
  Top Layer w10: v1(2461.1,3543.11) 2514.02,3543.11 2529.53,3527.61 C28.2
  Top Layer w20: C28.2 2578.74,3511.81 2604.39,3486.17 2604.39,3458.61 v2(2606.3,3456.69) ; C23.2 3137.4,2503.54 3137.4,2425.59 TP5.1
  Top Layer w30: v1(3037.4,2661.42) C25.2
  Top Layer w40: C23.2 C24.2 C25.2
  Layer 2 w20: v2(2606.3,3456.69) 2606.3,3092.52 v1(3037.4,2661.42)
  Bottom Layer w20: Z1.1 2434.33,3569.88 v1(2461.1,3543.11)
LIN: C42.2 IC1.24 IC4.10 R25.1 | length 852.2
  Top Layer w10: v2(2637.8,3641.73) IC1.24
  Top Layer w20: v2@2622.05,4012.01 v2(2622.05,4011.81) 2624.75,4011.81 2648.38,4035.43 C42.2 ; C42.2@2681.1,4036.42 2747.05,4036.42 R25.1
  Layer 2 w10: v1(2461.1,3493.11) 2538.39,3493.11 2637.8,3592.52 v2(2637.8,3641.73)
  Layer 2 w20: v2@2621.54,4016.41 2621.54,3660.69 2637.8,3644.44 v2(2637.8,3641.73)
NetBR1_1: BR1.1 R10.1 | length 112.1
  Top Layer w20: R10.1 R10.1@3032.48,2951.77
  Top Layer w30: R10.1@3032.48,2951.77 BR1.1
NetBR1_3: BR1.3 T1.6 | length 233.5
  Top Layer w35: BR1.3 3568.28,2855.32 3586.59,2837.01 T1.6
NetBR1_4: BR1.4 T1.5 | length 240.5
  Top Layer w35: BR1.4 3551.35,2951.77 3586.59,2987.01 T1.5
NetC1_1: C1.1 C2.1 IC1.22 | length 196.4
  Top Layer w10: C2.1 2698.03,3829.31 C1.1 2698.61,3814.17 2714.08,3798.7 2731.02,3798.7 2775.59,3754.13 IC1.22
NetC1_2: C1.2 C2.2 IC1.21 | length 157.6
  Top Layer w10: IC1.21 2799.21,3821.47 C1.2 2805.91,3829.31 C2.2
NetC3_1: C3.1 IC1.15 IC1.16 IC1.17 IC1.18 IC1.19 R1.1
NetC17_1: C17.1 C19.1 IC1.1 R7.2 | length 297.1
  Top Layer w10: C19.1 C17.1 2741.34,3312.2 2775.59,3346.46 IC1.1
  Top Layer w20: R7.2 2740.35,3202.76 C19.1
NetC17_2: C17.2 C19.2 IC1.3 | length 221.4
  Top Layer w10: IC1.3 2822.83,3338.58 2849.21,3312.2 C17.2 C19.2
NetC20_2: C20.2 IC4.4 RT1.2 Z1.2 | length 227.7
  Top Layer w20: C20.2 2130.71,3721.42 2102.36,3693.07 RT1.2 2183.07,3671.26 2208.43,3645.91 2244.76,3645.91 IC4.4
  other v1: 2125.98,3733.27
NetC21_2: C21.2 C22.2 IC3.3 IC3.5 R10.2 | length 681.2
  Top Layer w10: IC3.5 2919.29,2645.67 2888.51,2614.89 2888.51,2479.18 2898.47,2469.22 3022.42,2469.22 3039.37,2486.17 3039.37,2513.78 IC3.3
  Top Layer w20: R10.2 R10.2@2915.94,2950.2 ; C22.2@2915.94,2866.53 C22.2 ; C21.2 C21.2@2918.9,2775.2 ; IC3.5@2918.9,2661.81 IC3.5
  Top Layer w30: C22.2@2915.94,2866.53 R10.2@2915.94,2950.2 ; C21.2 C22.2 ; IC3.5@2918.9,2661.81 C21.2@2918.9,2775.2
NetC26_2: C26.2 IC4.13 R12.2 | length 190.4
  Top Layer w10: C26.2@2519.17,3749.09 2534.65,3764.57 v2(2549.21,3764.57)
  Layer 2 w10: v1(2464.57,3645.67) 2549.21,3730.32 v2(2549.21,3764.57)
NetC27_1: C27.1 IC4.6 R13.1 | length 232.6
  Top Layer w10: C27.1 2130.71,3488.98 R13.1 2181.32,3494.1 2230.34,3543.11 IC4.6
NetC31_1: C31.1 IC5.2 IC6.2 | length 275.1
  Top Layer w20: IC5.2 4283.46,2646.46 4438.98,2646.46 C31.1 4485.43,2644.49 4511.81,2618.11 4511.81,2588.39 IC6.2
NetC31_2: C31.2 IC6.1 R16.1 R17.1 R18.1 R19.1 R20.2 | length 764.1
  Top Layer w20: R20.2 4362.2,2558.96 4373.92,2547.24 4374.02,2547.24 4385.83,2535.43 4439.76,2535.43 C31.2 4546.65,2536.62 IC6.1@4588.78,2578.74 ; IC6.1 4588.78,2584.82 4590.59,2583.01 4771.98,2583.01 R17.1 ; R19.1 R18.1 R17.1 ; R16.1 R17.1
NetIC1_2: IC1.2 TP4.1 | length 380.4
  Top Layer w10: TP4.1 2799.21,3039.37 IC1.2
NetIC1_4: IC1.4 IC1.5 IC1.6 IC1.7 IC1.8 IC1.9 IC1.10 IC1.11 IC1.MP2 R3.1 R4.1 R6.2
  other v1: 2998.7,3119.09 3018.7,3119.09 3038.7,3119.09 2998.7,3138.46 3018.7,3138.46 3038.7,3138.46 2998.7,3158.46 3018.7,3158.46 3038.7,3158.46 2998.7,3177.83 3018.7,3177.83 3038.7,3177.83 2998.7,3197.83 3018.7,3197.83 3038.7,3197.83 2998.7,3217.2 3018.7,3217.2 3038.7,3217.2 2998.7,3237.2 3018.7,3237.2 3038.7,3237.2 2998.7,3256.57 3018.7,3256.57 3038.7,3256.57 2998.7,3276.57 3018.7,3276.57 3038.7,3276.57 2998.7,3295.94 3018.7,3295.94 3038.7,3295.94 2998.7,3315.94 2998.7,3315.63 3018.7,3315.94 3018.7,3315.63 3038.7,3315.94 3038.7,3315.63 2998.7,3335.63 3018.7,3335.63 3038.7,3335.63 2998.7,3355 3018.7,3355 3038.7,3355 2998.7,3375 3018.7,3375 3038.7,3375 2998.7,3394.37 3018.7,3394.37 3038.7,3394.37 2998.7,3414.37 3018.7,3414.37 3038.7,3414.37 2941.22,3449.29 2961.22,3449.29 2981.22,3449.29 3000.28,3449.29 3020.28,3449.29 3040.28,3449.29 2941.22,3469.29 2961.22,3469.29 2981.22,3469.29 3000.28,3469.29 3020.28,3469.29 3040.28,3469.29
NetIC1_12: IC1.12 IC1.13 IC1.14 IC1.MP3 R8.2 T1.3 TP11.1 | length 607.6
  Top Layer w10: R8.2 2565.19,3913.39 2600.63,3877.95 v1(2653.54,3877.95)
  Top Layer w20: v1(3042.91,3618.11) 3106.3,3618.11 TP11.1
  Layer 3 w10: v1(2653.54,3877.95) 2653.54,3862.2 2814.96,3700.79 2873.7,3642.05 v1(2932.76,3642.05)
  other v1: 3042.91,3594.49 2932.76,3602.05 2952.76,3602.05 2991.81,3602.05 3011.81,3602.05 2932.76,3622.05 2952.76,3622.05 2991.81,3622.05 3011.81,3622.05 2952.76,3642.05 2991.81,3642.05 3011.81,3642.05 3042.91,3641.73
NetIC1_20: IC1.20 TP2.1 | length 385.1
  Top Layer w10: IC1.20 2822.83,3754.13 2862.2,3793.51 2862.2,4003.94 2891.54,4033.27 2891.54,4066.14 2913.39,4087.99 TP2.1
NetIC1_25: IC1.25 R24.2 | length 286.5
  Bottom Layer w10: R24.2 2669.29,3582.28 v3(2705.12,3618.11)
NetIC2_3: IC2.3 Q1.4 TP12.1 | length 389.5
  Top Layer w20: Q1.4 v1(4746.85,3405) ; v1(4955,3330) 4955.59,3329.41 4988.98,3329.41 IC2.3 4991.46,3326.93 4991.46,3264.45 TP12.1
  Bottom Layer w20: v1(4746.85,3405) 4746.85,3398.15 4780,3365 4920,3365 v1(4955,3330)
NetIC2_4: IC2.4 R5.2 | length 67
  Top Layer w20: v1(5088.58,3260.83) 5088.58,3326.97 IC2.4
NetIC2_6: IC2.6 R2.1 | length 104.7
  Top Layer w20: IC2.6 5089.29,3402.48 5193.82,3402.48 R2.1
NetIC4_1: IC4.1 R9.1 | length 64.3
  Top Layer w10: v2(2240.16,3854.33) 2240.16,3800.51 IC4.1
NetIC4_5: IC4.5 R11.1 | length 112
  Top Layer w10: R11.1 R11.1@2136.42,3593.11
  Top Layer w20: R11.1@2136.42,3593.11 IC4.5
NetIC4_16: IC4.16 R8.1 | length 156
  Top Layer w10: R8.1 2397.64,3839.35 2443.41,3793.58 IC4.16@2460.63,3793.58
NetIC5_1: IC5.1 R14.1 | length 166.5
  Top Layer w20: R14.1 IC5.1
NetJ1_2: J1.2 R19.2 | length 121.2
  Top Layer w20: R19.2 4850.59,2379.73 4971.26,2379.73 J1.2
NetJ1_4: J1.4 R18.2 | length 121.1
  Top Layer w20: R18.2 4850.46,2479.59 4971.39,2479.59 J1.4
NetJ1_6: J1.6 R17.2 | length 121.1
  Top Layer w20: R17.2 4850.46,2579.46 4971.39,2579.46 J1.6
NetJ1_8: J1.8 R16.2 | length 121.2
  Top Layer w20: R16.2 4850.59,2679.33 4971.26,2679.33 J1.8
NetJ5_1: J5.1 R21.2 | length 176
  Top Layer w20: R21.2 2312.01,4274.61 2312.01,4447.83 J5.1
NetJ8_1: J8.1 R25.2 | length 337.4
  Layer 2 w20: J8.1 2746.06,4114.17 v1(2748.03,4112.2)
NetQ1_5: Q1.5 Q1.6 Q1.7 Q1.8 Q1.9 R2.2 T1.8 T1.9 | length 378.9
  Top Layer w20: v1(4875,3215) 5173.66,3215 5196.85,3238.19 5196.85,3281.5 R2.2
  other v1: 4746.85,3135.43 4796.85,3135.43 4846.85,3135.43 4896.85,3135.43 4775,3195 4795,3195 4815,3195 4835,3195 4855,3195 4875,3195 4775,3215 4795,3215 4815,3215 4835,3215 4855,3215 4775,3235 4795,3235 4815,3235 4835,3235 4855,3235 4875,3235 4775,3255 4795,3255 4815,3255 4835,3255 4855,3255 4875,3255
SGND: BR1.2 C15.1 C16.2 C20.1 C21.1 C22.1 C23.1 C24.1 C25.1 C26.1 C27.2 C28.1 C29.2 C30.1 C33.1 C42.1 IC1.28 IC1.MP1 IC3.2 IC3.A2 IC3.B2 IC4.9 IC5.3 J3.1 J5.2 J5.3 J5.4 J5.5 J8.2 J8.3 J8.4 J8.5 NT1.2 R11.2 R12.1 R13.2 R15.1 RT1.1 TP8.1 | length 185.4
  Top Layer w20: TP8.1@2027.56,4348.82 J5.2
  other v1: 2755.59,3523.31 2775.59,3523.31 2795.59,3523.31 2755.59,3543.31 2775.59,3543.31 2795.59,3543.31 2755.59,3562.68 2775.59,3562.68 2795.59,3562.68 2755.59,3582.68 2775.59,3582.68 2795.59,3582.68 2755.59,3602.05 2775.59,3602.05 2795.59,3602.05 2755.59,3622.05 2775.59,3622.05 2795.59,3622.05
  other v2: 3244.88,2503.94 2978.35,2529.53 3244.88,2582.68 2978.35,2588.58 2978.35,2647.64 3907.48,2648.43 3641.73,2657.09 3244.88,2661.42 3779.53,2667.32 3027.56,2775.59 3149.61,2854.33 3027.56,2866.14 2389.76,3081.5 2464.57,3081.5 2357.09,3356.3 2022.83,3395.67 2461.1,3443.11 2529.53,3456.69 2017.72,3494.1 2017.72,3592.52 2559.06,3661.42 2051.18,3671.26 2022.84,3730.31 2681.1,4090.55 2417.32,4255.91
  other v3: 2705.12,3547.24
VIN: C3.2 C4.1 C5.2 C6.1 C7.2 C8.1 C9.2 C10.1 C11.1 C12.2 C13.1 C14.1 J2.1 J2.2 R1.2 R9.2 T1.1 TP1.1 | length 958.4
  Top Layer w10: v1(2637.8,4212.6) 3070.87,4212.6 ; 3716.54,3724.41 3716.54,3751.97
  Layer 2 w10: v2(2240.16,3972.44) 2393.5,3972.44 2397.64,3972.44 2475.18,4036.39 ccw(c2437.01,4082.68) 2481.2,4042.09 v1(2637.8,4212.6)
  other v1: 3185,3730 3205,3730 3225,3730 3245,3730 3265,3730 3285,3730 3185,3750 3205,3750 3225,3750 3245,3750 3265,3750 3285,3750 3220.16,3909.13 3240.16,3909.13 3220.16,3929.13 3240.16,3929.13 3220.16,4070.55 3240.16,4070.55 3220.16,4090.55 3240.16,4090.55 3220.16,4231.97 3240.16,4231.97 3220.16,4251.97 3240.16,4251.97 3220.16,4389.45 3240.16,4389.45 3220.16,4410 3240.16,4410
VOUT: C18.2 C34.1 C35.2 C36.2 C37.2 C38.2 C39.2 C40.2 C41.2 IC2.1 IC2.5 J1.1 J1.3 J1.5 J1.7 J6.1 J6.2 R14.2 R22.2 T1.11 T1.12 TP3.1 TP10.1 | length 2081.4
  Top Layer w30: v2(5166.34,2379.53) J1.3 J1.5 v2(5166.34,2679.53)
  Layer 2 w30: v2(4399.61,2381.89) 5163.98,2381.89 v2(5166.34,2379.53) ; v1(4968.5,3559.06) 4968.5,3424.68 v1(4990.79,3402.4) 5025.75,3402.4 5063.15,3365 v1(5089.21,3365) 5117.28,3365 5166.34,3315.95 v2(5166.34,2679.53)
  other v1: 4803.15,3561.02 4886.81,3561.02 5098.43,3592.13 5108.27,4005.91
pads on no net: IC1.23 IC1.29 IC1.30 IC1.31 IC3.1 IC4.2 IC4.3 IC4.14 IC4.15 MH1.1 MH2.1 MH3.1 MH4.1 T1.2 T1.4 T1.7 T1.10

## Polygon pours and split planes (outlines as drawn)
NetIC1_12 on Top Layer "NETIC1_12_L01_P000" (solid, pour order 0): 2893.7,3665.35 2893.7,3582.68 3062.99,3582.68 3062.99,3665.35
VIN on Top Layer "VIN_L01_P024" (solid, pour order 24): 4019.68,4437.01 4015.75,4433.07 3653.54,4433.07 3570.87,4515.75 3570.87,4645.67 3055,4645.67 3055,3810 3160.28,3704.72 4019.68,3704.72
GND_OUT on Top Layer "GND_OUT_L01_P041" (solid, pour order 41): 5047.24,3500 4724.41,3500 4724.41,3444 5047.24,3444
NetQ1_5 on Top Layer "NETQ1_5_L01_P027" (solid, pour order 27): 4910,3300 4910,2735 4175,2735 4175,3300
GND_OUT on Top Layer "GND_OUT_L01_P026" (solid, pour order 26): 4785,3340 4785,3450 4724.41,3450 4724.41,3500 5047.24,3500 5047.24,3455 4910,3455 4910,3340
NetIC1_4 on Top Layer "NETIC1_4_L01_P033" (solid, pour order 33): 2830.71,3145.67 2905.51,3145.67 2905.51,3074.8 2830.71,3074.8
NetC3_1 on Top Layer "NETC3_1_L01_P025" (solid, pour order 25): 2905.51,3740.16 2905.51,4055.12 3023.62,4055.12 3023.62,3740.16
NetIC1_4 on Top Layer "NETIC1_4_L01_P022" (solid, pour order 22): 2895,3510 3094.88,3510 3094.88,3386.49 3150,3386.49 3150,3075 2895,3075
GND on Top Layer "GND_L01_P021" (solid, pour order 21): 3220,3535 3220,3225 3505,3225 3505,3535
NetC3_1 on Top Layer "NETC3_1_L01_P003" (solid, pour order 3): 3023.62,3763.78 3023.62,3740.16 2905.51,3740.16 2905.51,3763.78
VOUT on Top Layer "VOUT_L01_P015" (solid, pour order 15): 4464.57,4645.67 4464.57,3550 5157.48,3550 5157.48,4645.67
SGND on Bottom Layer "SGND_L04_P029" (solid, pour order 29): 1960.63,4645.67 3001.97,4645.67 3001.97,3188.98 3316.93,3188.98 3316.93,2726.38 3326.77,2716.54 4035.43,2716.54 4035.43,2332.68 1960.63,2332.68
GND on Bottom Layer "Bottom Layer-GND" (solid, pour order 17): 3035.43,4645.67 3035.43,3225 3505,3225 3505,4645.67
GND on Bottom Layer "GND_L04_P034" (solid, pour order 34): 3505,4645.67 3503.94,4644.61 3503.94,3854.33 4019.68,3854.33 4019.68,4645.67
NetQ1_5 on Bottom Layer "NETQ1_5_L04_P028" (solid, pour order 28): 4910,3300 4910,2735 4175,2735 4175,3300
GND_OUT on Bottom Layer "GND_OUT_L04_P004" (solid, pour order 4): 4165.35,4645.67 5570.87,4645.67 5570.87,2326.77 4165.35,2326.77
NetIC1_12 on Layer 2 "NONET_L-01_P-001" (solid, pour order 44): 2893.7,3680.12 2893.7,3560.04 3335.63,3560.04 3510.83,3384.84 3629.92,3384.84 3654.53,3409.45 3654.53,3481.3 3630.91,3504.92 3569.88,3504.92 3394.68,3680.12
NetQ1_5 on Layer 2 "NETQ1_5_L02_P039" (solid, pour order 39): 4175.2,3300.2 4910.43,3300.2 4910.43,2735.24 4707.68,2735.24 4706.69,2734.25 4175.2,2734.25
NetIC1_4 on Layer 2 "NETIC1_4_L02_P038" (solid, pour order 38): 2830.71,3145.67 2895.67,3145.67 2895.67,3509.84 3094.49,3509.84 3094.49,3385.83 3149.61,3385.83 3149.61,3075.79 2830.71,3075.79
NetC3_1 on Layer 2 "NETC3_1_L02_P035" (solid, pour order 35): 2905.51,4055.12 3023.62,4055.12 3023.62,3740.16 2905.51,3740.16
NetIC1_12 on Layer 3 "NETIC1_12_L03_P020" (solid, pour order 20): 2893.7,3680 3395,3680 3570,3505 3630,3505 3655,3480 3655,3410 3630,3385 3510,3385 3335,3560 2893.7,3560
NetQ1_5 on Layer 3 "NETQ1_5_L03_P040" (solid, pour order 40): 4175.2,3300.2 4910.43,3300.2 4910.43,2735.24 4904.53,2735.24 4903.54,2736.22 4175.2,2736.22
NetC3_1 on Layer 3 "NETC3_1_L03_P036" (solid, pour order 36): 2905.51,4055.12 3023.62,4055.12 3023.62,3740.16 2905.51,3740.16
GND on Layer 3 "GND_L03_P019" (solid, pour order 19): 3170,3515 3170,3295 3220,3245 3310,3245 3350,3285 3350,3485 3320,3515

## Silkscreen, mask and mechanical layers (free items; w line width, h text height)
Top Overlay:
  lines w9.84: 4094.49,2332.68 4094.49,2372.05 ; 4094.49,4645.67 4094.49,2372.05 ; 4094.49,2372.05 4094.49,2372.05
Mechanical 1:
  the board outline again, w10